# EAGLE board h_bridge_v2 (EAGLE 5.00)
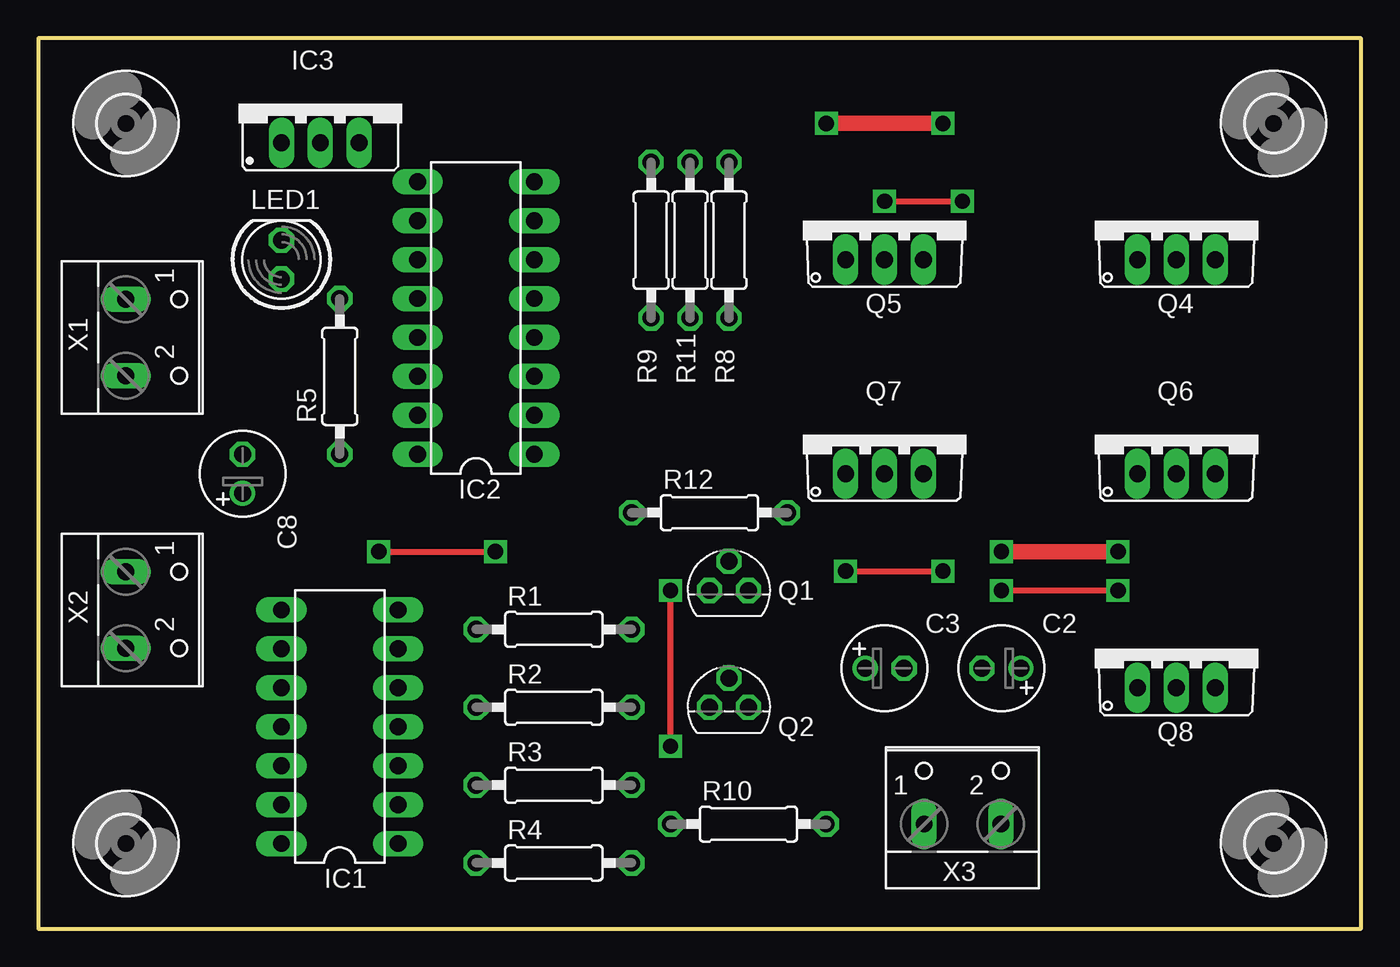
[diagram p0: board, top side]
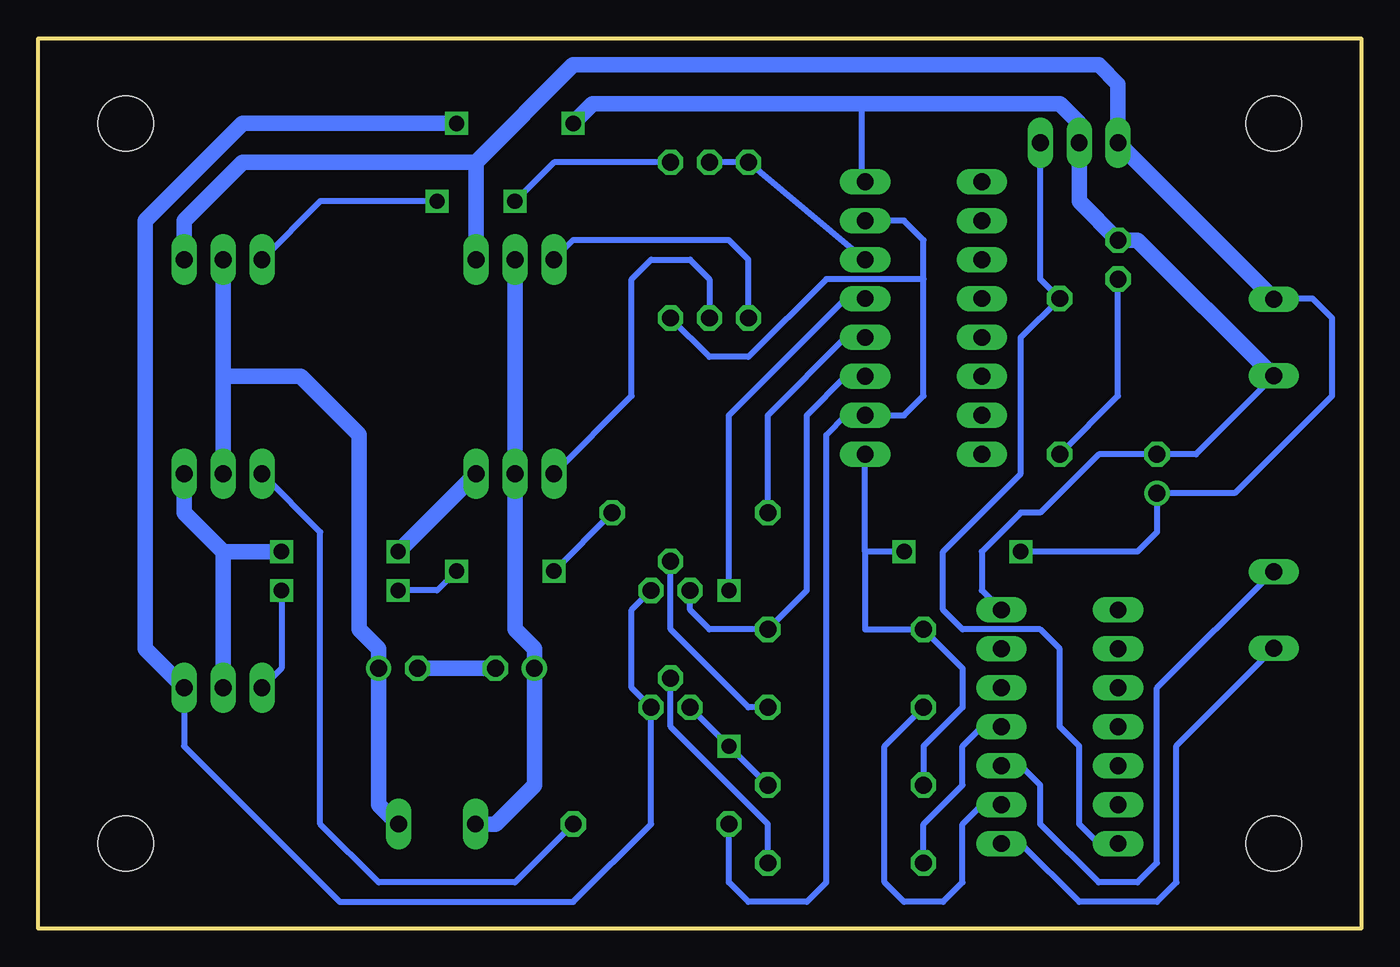
[diagram p1: board, bottom side, seen from below]

Size 86.35 x 58.09 mm. Coordinates in mm from the lower left corner, seen from the top.
Outline: 86.35,0 86.35,58.09 0,58.09 0,0 86.35,0
Copper layers (1*16): Top 0.035mm / dielectric 1.5mm / Bottom 0.035mm
Design rules "default": minimum track width 10mil, minimum drill 24mil, track to track 8mil, track to pad 8mil, pad to pad 8mil, via to via 8mil, smd to smd 8mil, copper to edge 40mil, drill to drill 8mil, minimum pad ring 10mil, minimum via ring 8mil, stop-mask expansion 4mil, vias tented up to drill 0mil, thermal gap 10mil

## Footprints (pad centres in the part's own frame; a part is rotated, then mirrored left to right if it is on the bottom)
E2,5-6 = drill 1.1 round: + -1.27,0 | drill 1.1 pad 1.6 octagon: - 1.27,0
DIL14 = drill 1.1 long: 1 -7.62,-3.81; 2 -5.08,-3.81; 3 -2.54,-3.81; 4 0,-3.81; 5 2.54,-3.81; 6 5.08,-3.81; 7 7.62,-3.81; 8 7.62,3.81; 9 5.08,3.81; 10 2.54,3.81; 11 0,3.81; 12 -2.54,3.81; 13 -5.08,3.81; 14 -7.62,3.81
DIL16 = drill 1.1 long: 1 -8.89,-3.81; 2 -6.35,-3.81; 3 -3.81,-3.81; 4 -1.27,-3.81; 5 1.27,-3.81; 6 3.81,-3.81; 7 6.35,-3.81; 8 8.89,-3.81; 9 8.89,3.81; 10 6.35,3.81; 11 3.81,3.81; 12 1.27,3.81; 13 -1.27,3.81; 14 -3.81,3.81; 15 -6.35,3.81; 16 -8.89,3.81
78XXS = drill 1.1 long: GND 0,-2.54; IN -2.54,-2.54; OUT 2.54,-2.54
LED5MM = drill 1.1 octagon: A -1.27,0; K 1.27,0
TO92 = drill 1.1 octagon: 1 1.27,0; 2 0,1.905; 3 -1.27,0
TO220AV = drill 1.1 long: B -2.54,-2.54; C 0,-2.54; E 2.54,-2.54
0207/10 = drill 1.1 octagon: 1 -5.08,0; 2 5.08,0
3,6 = hole 3.6: 0,0
W237-102 = drill 1.1 long: 1 -2.5,-1.27; 2 2.5,-1.27

## Placement (x,y rotation side)
C2  220uF  [E2,5-6]  62.86,16.98 180 top
C3  220uF  [E2,5-6]  55.24,16.98 0 top
C8  0.1uF  [E2,5-6]  13.33,29.68 90 top
IC1  7404  [DIL14]  19.68,13.17 90 top
IC2  4049  [DIL16]  28.57,39.84 90 top
IC3  7805  [78XXS]  18.41,53.81 0 top
LED1  [LED5MM]  15.87,43.65 90 top
Q1  BC337  [TO92]  45.08,22.06 0 top
Q2  BC337  [TO92]  45.08,14.44 0 top
Q4  TIP115  [TO220AV]  74.29,46.19 0 top
Q5  TIP115  [TO220AV]  55.24,46.19 0 top
Q6  TIP112  [TO220AV]  74.29,32.22 0 top
Q7  TIP112  [TO220AV]  55.24,32.22 0 top
Q8  TIP112  [TO220AV]  74.29,18.25 0 top
R1  10K  [0207/10]  33.65,19.52 180 top
R2  1K  [0207/10]  33.65,14.44 0 top
R3  10K  [0207/10]  33.65,9.36 180 top
R4  1K  [0207/10]  33.65,4.28 0 top
R5  1K  [0207/10]  19.68,36.03 90 top
R8  10K  [0207/10]  45.08,44.92 90 top
R9  10K  [0207/10]  40,44.92 90 top
R10  10K  [0207/10]  46.35,6.82 0 top
R11  10K  [0207/10]  42.54,44.92 90 top
R12  10K  [0207/10]  43.81,27.14 0 top
U$1  [3,6]  80.64,5.55 90 top
U$2  [3,6]  80.64,52.54 90 top
U$3  [3,6]  5.71,52.54 90 top
U$4  [3,6]  5.71,5.55 90 top
X1  POWER  [W237-102]  6.98,38.57 270 top
X2  CONTROL  [W237-102]  6.98,20.79 270 top
X3  MOTOR  [W237-102]  60.32,8.09 0 top

## Library data of the parts
C2 C3 C8 IC1-IC3 LED1 Q1 Q2 Q4-Q8 R1-R5 R8-R12 X1-X3 = h-bridge
U$1-U$4 = holes

## Nets
+5V: IC1.14 IC3.OUT R5.2
+12V: C8.+ IC2.1 IC3.IN Q4.E Q5.E R1.2 R3.2 X1.1
GND: C8.- IC1.7 IC2.8 IC3.GND LED1.K Q1.1 Q2.1 Q8.E X1.2
N$1: IC1.1 X2.2
N$2: IC2.5 Q2.3 R3.1
N$3: IC1.3 X2.1
N$4: LED1.A R5.1
N$5: Q1.2 R2.2
N$6: IC1.4 R4.1
N$7: IC2.6 R9.2 R11.2
N$9: IC1.2 R2.1
N$10: IC2.3 Q1.3 R1.1
N$11: Q2.2 R4.2
N$15: Q7.B R11.1
N$16: IC2.2 IC2.7 R8.1 R10.1
N$17: C3.+ Q5.C Q7.C X3.1
N$18: Q6.B R10.2
N$19: Q4.B R8.2
N$20: Q5.B R9.1
N$21: C2.+ Q4.C Q6.C X3.2
N$24: Q8.B R12.2
N$26: Q6.E Q7.E Q8.C
N$28: C2.- C3.-
N$29: IC2.4 R12.1

## Tracks (layer width: path | path; a pad name or v marks a point on that pad's centre or on a via)
+5V
  Bottom 0.406: IC1.14 17.14,5.55 18.41,6.82 18.41,11.9 19.68,13.17 19.68,18.25 20.95,19.52 26.03,19.52 27.3,20.79 27.3,24.6 26.03,25.87 22.22,29.68 22.22,38.57 R5.2 20.95,42.38 IC3.OUT
+12V  (via drill 1, 1 pad 0.61)
  Top 0.406: v22.22,24.6 v29.84,24.6
  Bottom 0.406: 32.63,30.95 IC2.1 32.38,24.6 | 32.38,24.6 32.38,19.52 R1.2 26.03,16.98 26.03,14.44 28.57,11.9 R3.2 | v29.84,24.6 32.38,24.6 | v22.22,24.6 14.6,24.6 13.33,25.87 C8.+ 8.25,28.41 1.9,34.76 1.9,39.84 3.17,41.11 5.71,41.11 X1.1
  Bottom 1.016: 57.78,50 51.43,56.35 17.14,56.35 15.87,55.08 IC3.IN 5.71,41.11 | 57.78,50 Q5.E | Q4.E 76.83,46.19 73.02,50 57.78,50
GND  (via drill 1)
  Top 1.016: v51.43,52.54 v59.05,52.54
  Bottom 0.406: IC2.8 32.63,48.73 32.63,53.56 32.38,53.81 | Q8.E 76.83,11.9 66.67,1.74 51.43,1.74 46.35,6.82 Q2.1 47.62,15.71 47.62,20.79 Q1.1 | 5.71,36.03 10.79,30.95 C8.- 17.14,30.95 20.95,27.14 22.22,27.14 24.76,24.6 24.76,22.06 IC1.7
  Bottom 0.813: 5.75,36.07 X1.2 5.71,36.03
  Bottom 1.016: 5.75,36.07 14.6,44.92 LED1.K 18.41,47.46 IC3.GND 18.41,52.54 19.68,53.81 32.38,53.81 50.16,53.81 v51.43,52.54 | v59.05,52.54 73.02,52.54 79.37,46.19 79.37,18.25 Q8.E
N$1
  Bottom 0.406: X2.2 12.06,11.94 12.06,3.01 13.33,1.74 18.41,1.74 22.22,5.55 IC1.1
N$2  (via drill 1)
  Top 0.406: v41.27,11.9 v41.27,22.06
  Bottom 0.406: R3.1 v41.27,11.9 Q2.3 | v41.27,22.06 41.27,33.49 33.65,41.11 IC2.5
N$3
  Bottom 0.406: IC1.3 22.22,10.63 20.95,9.36 20.95,6.82 17.14,3.01 14.6,3.01 13.33,4.28 13.33,15.71 5.71,23.33 X2.1
N$4
  Bottom 0.406: R5.1 15.87,34.76 LED1.A
N$5
  Bottom 0.406: Q1.2 45.08,19.52 40,14.44 R2.2
N$6
  Bottom 0.406: IC1.4 24.76,13.17 26.03,11.9 26.03,9.36 28.57,6.82 R4.1
N$7
  Bottom 0.406: R9.2 R11.2 R9.2 | IC2.6 R9.2
N$9
  Bottom 0.406: R2.1 31.11,11.9 31.11,3.01 29.84,1.74 27.3,1.74 26.03,3.01 26.03,6.82 24.76,8.09 IC1.2
N$10
  Bottom 0.406: Q1.3 43.81,20.79 42.54,19.52 R1.1 36.19,22.06 36.19,33.49 33.65,36.03 IC2.3
N$11
  Bottom 0.406: 45.08,16.73 Q2.2 45.08,13.17 38.73,6.82 R4.2
N$15
  Bottom 0.406: Q7.B 47.62,34.76 47.62,42.38 46.35,43.65 43.81,43.65 42.54,42.38 R11.1
N$16
  Bottom 0.406: R10.1 41.27,3.01 40,1.74 36.19,1.74 34.92,3.01 34.92,32.22 33.65,33.49 IC2.2 29.84,33.49 28.57,34.76 28.57,42.38 | 28.57,42.38 28.57,44.92 29.84,46.19 IC2.7 | R8.1 42.54,37.3 40,37.3 34.92,42.38 28.57,42.38
N$17
  Bottom 1.016: X3.1 56.51,6.82 53.97,9.36 C3.+ 53.97,18.25 55.24,19.52 Q7.C Q5.C
N$18
  Bottom 0.406: R10.2 55.24,3.01 64.13,3.01 67.94,6.82 67.94,25.87 Q6.B
N$19  (via drill 1)
  Top 0.406: v55.24,47.46 v60.32,47.46
  Bottom 0.406: R8.2 52.7,50 v55.24,47.46 | v60.32,47.46 67.94,47.46 Q4.B
N$20
  Bottom 0.406: R9.1 40,43.65 41.27,44.92 51.43,44.92 Q5.B
N$21
  Bottom 1.016: 74.29,36.03 Q6.C | 74.29,36.03 Q4.C | 74.29,36.03 69.21,36.03 65.4,32.22 65.4,19.52 64.13,18.25 C2.+ 64.13,8.09 62.86,6.82 X3.2
N$24  (via drill 1)
  Top 0.406: v52.7,23.33 v59.05,23.33 | v62.86,22.06 v70.48,22.06
  Bottom 0.406: v70.48,22.06 70.48,16.98 Q8.B | R12.2 v52.7,23.33 | v62.86,22.06 60.32,22.06 v59.05,23.33
N$26  (via drill 1)
  Top 1.016: v70.48,24.6 v62.86,24.6
  Bottom 1.016: Q8.C 74.29,24.6 | 74.29,24.6 v70.48,24.6 | 74.29,24.6 76.83,27.14 Q6.E | v62.86,24.6 Q7.E
N$28
  Bottom 1.016: C3.- C2.-
N$29
  Bottom 0.406: R12.1 38.73,33.49 33.65,38.57 IC2.4